# EAGLE board breakout2but (EAGLE 7.5.0)
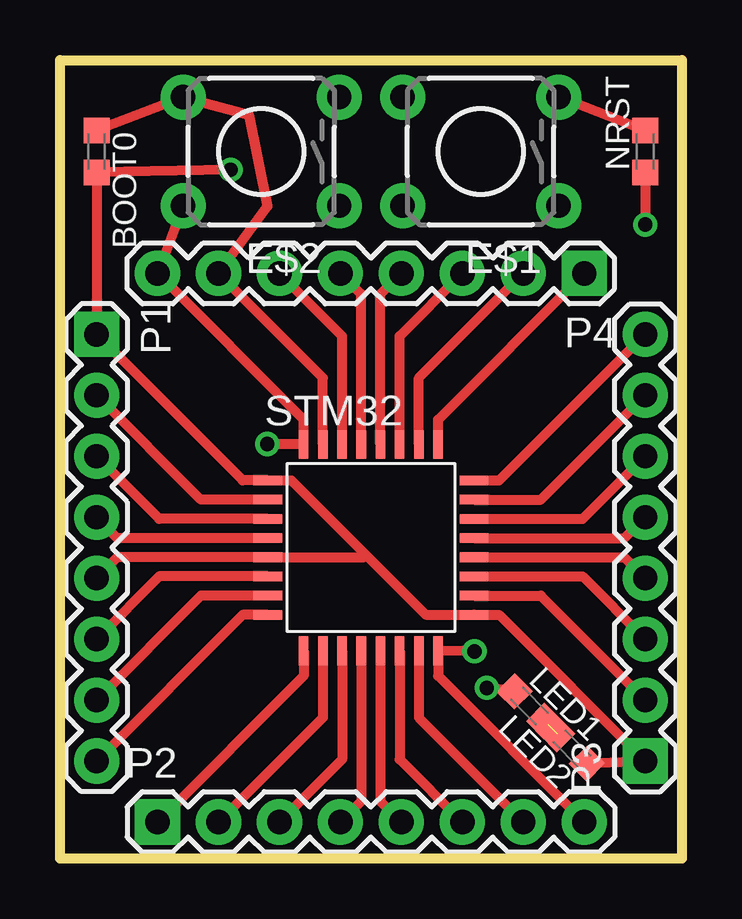
[diagram p0: board, top side]
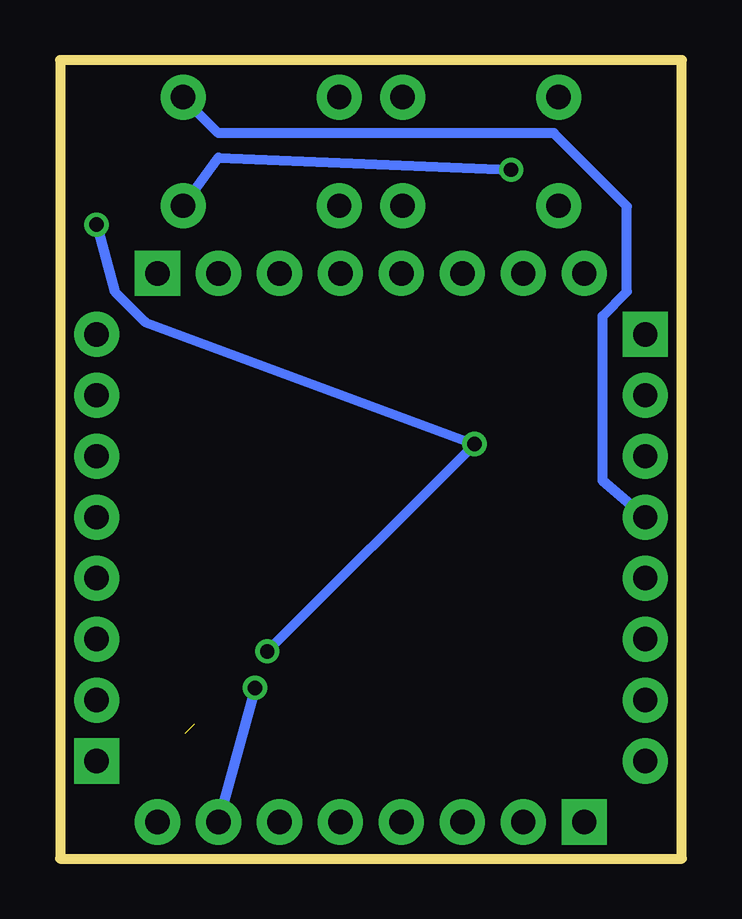
[diagram p1: board, bottom side, seen from below]

Size 25.91 x 33.27 mm. Coordinates in mm from the lower left corner, seen from the top.
Outline: 0,33.27 25.91,33.27 25.91,0 0,0 0,33.27
Copper layers (1*16): Top 0.035mm / dielectric 1.5mm / Bottom 0.035mm
Design rules "default": minimum track width 10mil, minimum drill 24mil, track to track 8mil, track to pad 8mil, pad to pad 8mil, via to via 8mil, smd to smd 8mil, copper to edge 40mil, drill to drill 8mil, minimum pad ring 10mil, minimum via ring 8mil, stop-mask expansion 4mil, vias tented up to drill 0mil, thermal gap 10mil

## Footprints (pad centres in the part's own frame; a part is rotated, then mirrored left to right if it is on the bottom)
C0603K = smd 1.05 x 1.08: 1 -0.875,0; 2 0.875,0
TACTILE-PTH = drill 1.016 pad 1.88: 1 -3.251,2.261; 2 3.251,2.261; 3 -3.251,-2.261; 4 3.251,-2.261
1X08 = drill 1.016 pad 1.88 square: 1 0,0 | drill 1.016 pad 1.88: 2 2.54,0; 3 5.08,0; 4 7.62,0; 5 10.16,0; 6 12.7,0; 7 15.24,0; 8 17.78,0
LQFP32-7X7 = smd 1.2 x 0.4: 1 -4.3,2.8; 2 -4.3,2; 3 -4.3,1.2; 4 -4.3,0.4; 5 -4.3,-0.4; 6 -4.3,-1.2; 7 -4.3,-2; 8 -4.3,-2.8; 17 4.3,-2.8; 18 4.3,-2; 19 4.3,-1.2; 20 4.3,-0.4; 21 4.3,0.4; 22 4.3,1.2; 23 4.3,2; 24 4.3,2.8 | smd 0.4 x 1.2: 9 -2.8,-4.3; 10 -2,-4.3; 11 -1.2,-4.3; 12 -0.4,-4.3; 13 0.4,-4.3; 14 1.2,-4.3; 15 2,-4.3; 16 2.8,-4.3; 25 2.8,4.3; 26 2,4.3; 27 1.2,4.3; 28 0.4,4.3; 29 -0.4,4.3; 30 -1.2,4.3; 31 -2,4.3; 32 -2.8,4.3

## Placement (x,y rotation side)
BOOT0  [C0603K]  1.52,29.46 270 top
E$1  [TACTILE-PTH]  17.53,29.46 180 top
E$2  [TACTILE-PTH]  8.38,29.46 180 top
LED1  [C0603K]  19.56,6.35 315 top
LED2  [C0603K]  21.34,4.57 135 top
NRST  [C0603K]  24.38,29.46 90 top
P1  [1X08]  1.52,21.84 270 top
P2  [1X08]  4.06,1.52 0 top
P3  [1X08]  24.38,4.06 90 top
P4  [1X08]  21.84,24.38 180 top
STM32  [LQFP32-7X7]  12.95,12.95 0 top

## Library data of the parts
BOOT0 LED1 LED2 NRST = resistor
E$1 E$2 = SparkFun-Electromechanical
P1-P4 = SparkFun-Connectors
STM32 = st-microelectronics

## Nets
BOOT0: BOOT0.1 E$2.4 P4.7 STM32.31
GND: E$2.2 NRST.1 P2.8 P4.8 STM32.16 STM32.32
NRST: NRST.2 P1.4 STM32.4
PA0: P1.6 STM32.6
PA1: P1.7 STM32.7
PA2: P1.8 STM32.8
PA3: P2.1 STM32.9
PA4: P2.2 STM32.10
PA5: P2.3 STM32.11
PA6: P2.4 STM32.12
PA7: P2.5 STM32.13
PA8: P3.2 STM32.18
PA9: P3.3 STM32.19
PA10: P3.4 STM32.20
PA11: P3.5 STM32.21
PA12: P3.6 STM32.22
PA13: P3.7 STM32.23
PA14: P3.8 STM32.24
PA15: P4.1 STM32.25
PB0: P2.6 STM32.14
PB1: LED1.1 P2.7 STM32.15
PB3: P4.2 STM32.26
PB4: P4.3 STM32.27
PB5: P4.4 STM32.28
PB6: P4.5 STM32.29
PB7: P4.6 STM32.30
PF0: P1.2 STM32.2
PF1: P1.3 STM32.3
S$4: LED1.2 LED2.2
VDD: BOOT0.2 E$1.1 LED2.1 P1.1 P1.5 P3.1 STM32.1 STM32.5 STM32.17

## Tracks (layer width: path | path; a pad name or v marks a point on that pad's centre or on a via)
BOOT0
  Top 0.406: STM32.31 10.95,20.03 P4.7 8.64,27.18 7.87,30.99 E$2.4 BOOT0.1
GND  (via drill 0.6, 0.6 pad 0.25)
  Top 0.406: P2.8 15.75,7.61 STM32.16 v17.27,8.64 | v8.64,17.27 STM32.32 10.15,18.29 P4.8 E$2.2 | NRST.1 v24.38,26.42
  Bottom 0.406: v17.27,8.64 v8.64,17.27 22.35,22.35 23.62,23.62 v24.38,26.42
NRST  (via drill 0.6)
  Top 0.406: STM32.4 2.39,13.35 P1.4 | v20.83,31.75 NRST.2
  Bottom 0.406: P1.4 3.3,15.75 3.3,22.61 2.29,23.62 2.29,27.18 5.33,30.23 19.3,30.23 v20.83,31.75
PA0
  Top 0.406: STM32.6 4.13,11.75 P1.6
PA1
  Top 0.406: STM32.7 5.87,10.95 P1.7
PA2
  Top 0.406: STM32.8 7.61,10.15 P1.8
PA3
  Top 0.406: STM32.9 10.15,7.61 P2.1
PA4
  Top 0.406: STM32.10 10.95,5.87 P2.2
PA5
  Top 0.406: STM32.11 11.75,4.13 P2.3
PA6
  Top 0.406: STM32.12 12.55,2.39 P2.4
PA7
  Top 0.406: STM32.13 13.35,2.39 P2.5
PA8
  Top 0.406: STM32.18 20.03,10.95 P3.2
PA9
  Top 0.406: STM32.19 21.77,11.75 P3.3
PA10
  Top 0.406: STM32.20 23.51,12.55 P3.4
PA11
  Top 0.406: STM32.21 23.51,13.35 P3.5
PA12
  Top 0.406: STM32.22 21.77,14.15 P3.6
PA13
  Top 0.406: STM32.23 20.03,14.95 P3.7
PA14
  Top 0.406: STM32.24 18.29,15.75 P3.8
PA15
  Top 0.406: STM32.25 15.75,18.29 P4.1
PB0
  Top 0.406: STM32.14 14.15,4.13 P2.6
PB1  (via drill 0.6 pad 0.25)
  Top 0.406: STM32.15 14.95,5.87 P2.7 | LED1.1 v17.78,7.11
  Bottom 0.406: v17.78,7.11 P2.7
PB3
  Top 0.406: STM32.26 14.95,20.03 P4.2
PB4
  Top 0.406: STM32.27 14.15,21.77 P4.3
PB5
  Top 0.406: STM32.28 13.35,23.51 P4.4
PB6
  Top 0.406: STM32.29 12.55,23.51 P4.5
PB7
  Top 0.406: STM32.30 11.75,21.77 P4.6
PF0
  Top 0.406: STM32.2 5.87,14.95 P1.2
PF1
  Top 0.406: STM32.3 4.13,14.15 P1.3
S$1  (via drill 0.6 pad 0.25)
  other vias: 8.64,17.27
S$2  (via drill 0.6 pad 0.25)
  other vias: 17.27,8.64
S$3  (via drill 0.6 pad 0.25)
  other vias: 17.78,7.11
S$4  (1 unrouted)
  Top 0.406: LED1.2 20.32,5.59
S$5  (via drill 0.6)
  other vias: 24.38,26.42
VDD  (via drill 0.6)
  Top 0.406: 12.73,12.66 9.64,15.75 STM32.1 7.61,15.75 P1.1 BOOT0.2 v7.11,28.7 | 12.73,12.66 15.23,10.16 STM32.17 18.29,10.15 P3.1 LED2.1 | P1.5 2.39,12.55 STM32.5 12.62,12.55 12.73,12.66
  Bottom 0.406: E$1.1 19.3,29.21 v7.11,28.7